# Altium PCB Arduino幻彩灯带.PcbDoc
Units mm, origin at the board's own origin, x right, y up, seen from the top; angles counter-clockwise.
Board outline 62.87 x 53.73 mm, 2 copper layers (Top Layer, Bottom Layer); 30 components, 36 nets, 147 pads, 2 vias.
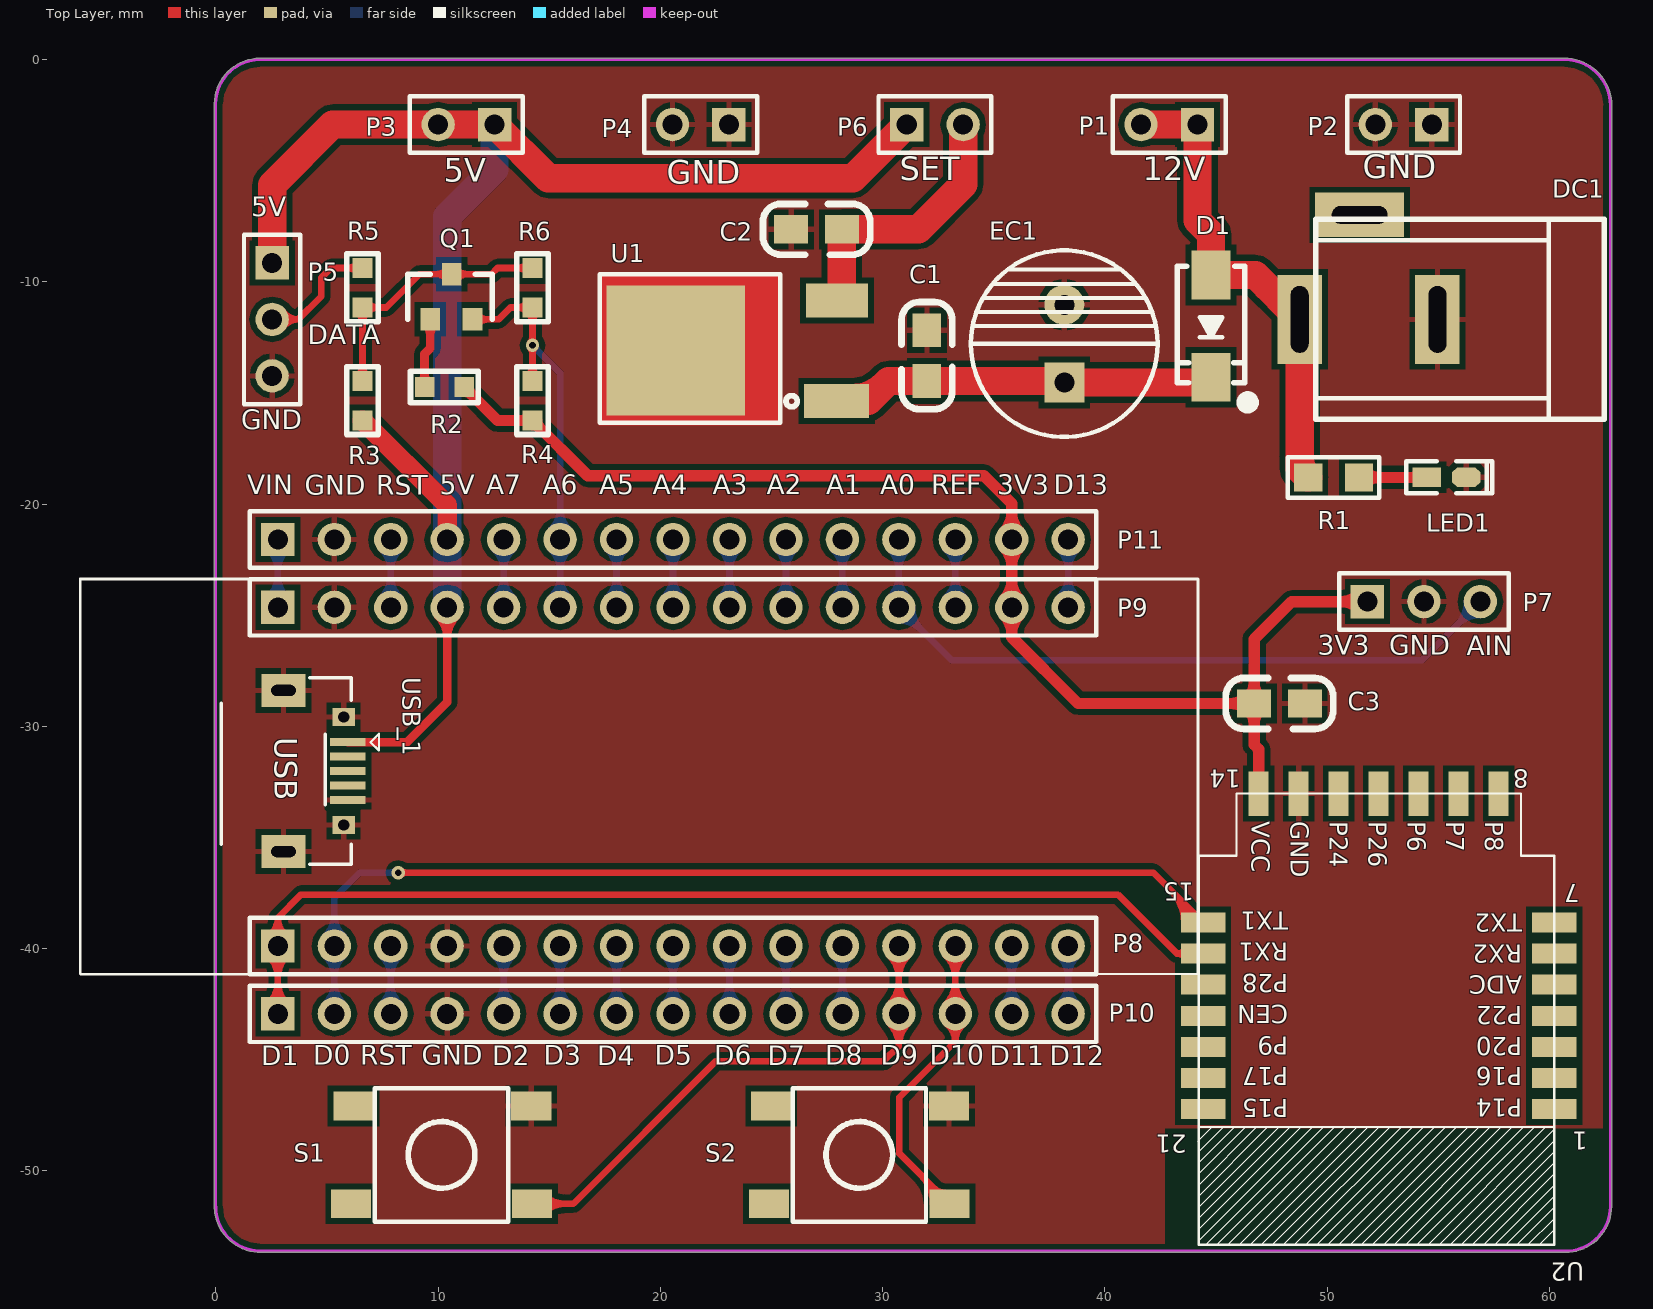
[diagram p0: Top Layer view]
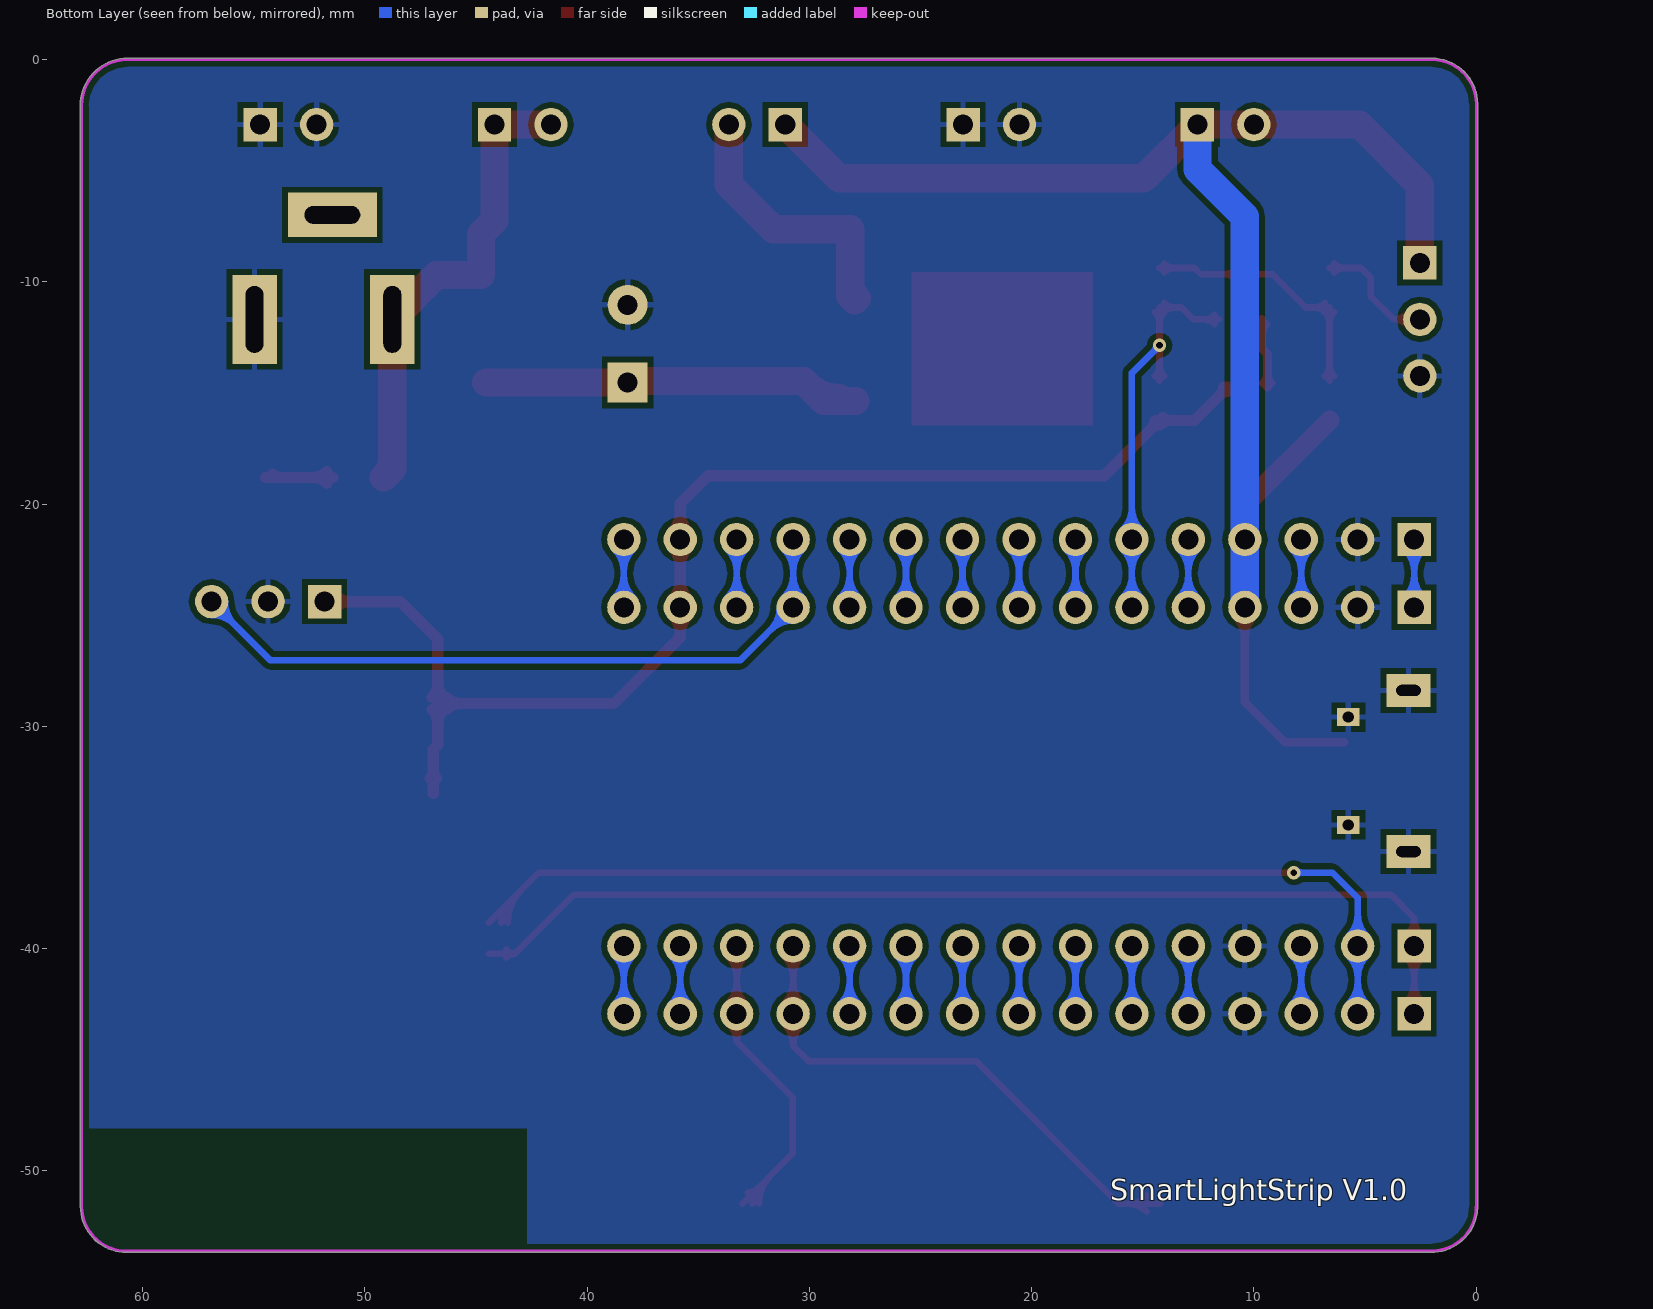
[diagram p1: Bottom Layer view, seen from below]
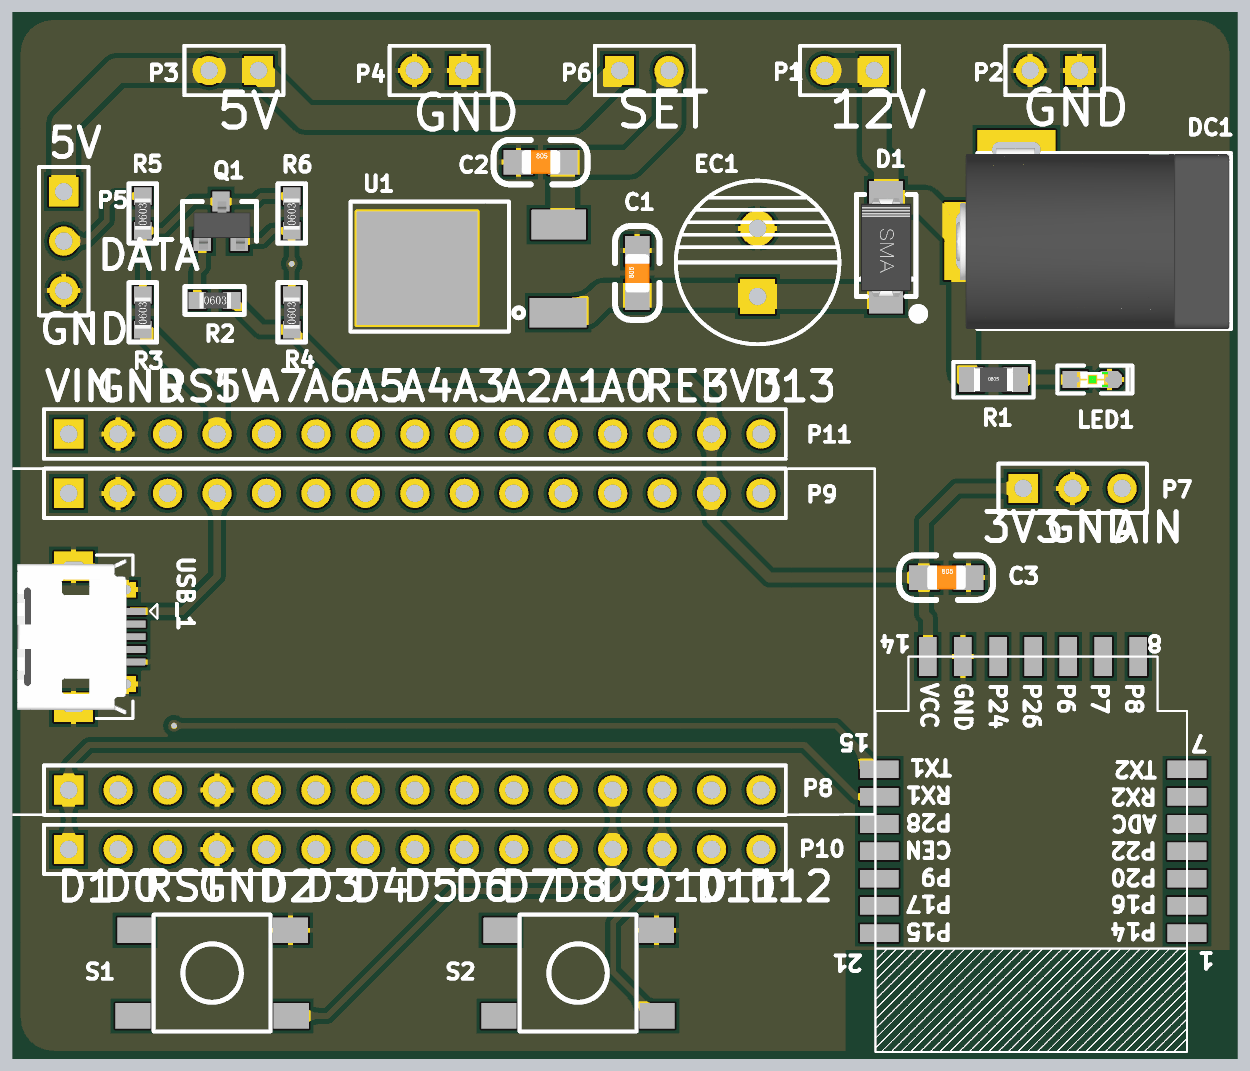
[diagram p2: 3D render of the assembled board from above, using the file's embedded part models]

## Layer stack, top to bottom
Top Layer: signal copper 0.0356
Dielectric: dielectric 0.32, FR-4, Dk 4.8
Bottom Layer: signal copper 0.0356

## Board outline
-0.053,-51.724 ccw(c2.007,-51.594) 1.884,-53.654 ccw(c1.905,-53.594) 1.905,-53.658 60.696,-53.658 ccw(c60.725,-53.601) 60.725,-53.665 ccw(c60.725,-51.587) 62.802,-51.587 62.802,-2.093 ccw(c62.745,-2.064) 62.809,-2.064 ccw(c60.681,-2.064) 60.681,0.064 1.981,0.064 ccw(c1.981,0) 1.977,0.064 ccw(c2,-2) -0.064,-1.977 ccw(c0,-1.981) -0.064,-1.981 -0.064,-51.689 ccw(c0,-51.689)

## Design rules (kind name [scope] priority, off if disabled: settings)
Clearance Clearance_1 [All] p1: gap=0.254
Clearance [InNet('GND') vs InNetClass('All Nets')] p2: gap=0.254
HoleSize [All] p1: absolutevalues=TRUE maxlimit=3 minlimit=0.025 maxpercent=80.000 minpercent=20.000
HoleToHoleClearance [All] p1: gap=0 allowstackedmicrovias=TRUE
MinimumSolderMaskSliver [All] p1: minsoldermaskwidth=0
PolygonConnect PolygonConnect_5 [InNet('+3.3V') vs IsPad] p1: connectstyle=Direct reliefconductorwidth=0.254 reliefentries=4 polygonreliefangle="90 Angle"
PolygonConnect PolygonConnect_4 [InNet('+3.3V') vs IsVia] p2: connectstyle=Direct reliefconductorwidth=0.254 reliefentries=4 polygonreliefangle="90 Angle"
PolygonConnect PolygonConnect_3 [InNet('+5V') vs IsVia] p3: connectstyle=Direct reliefconductorwidth=0.254 reliefentries=4 polygonreliefangle="90 Angle"
PolygonConnect PolygonConnect_2 [InNet('+5V') vs IsPad] p4: connectstyle=Direct reliefconductorwidth=0.254 reliefentries=4 polygonreliefangle="90 Angle"
PolygonConnect PolygonConnect_1 [InNet('GND') vs IsVia] p5: connectstyle=Direct reliefconductorwidth=0.254 reliefentries=4 polygonreliefangle="90 Angle"
PolygonConnect [All] p6: connectstyle=Relief reliefconductorwidth=0.254 reliefentries=4 polygonreliefangle="90 Angle"
RoutingVias [All] p1: holewidth=0.2 width=1.27 viastyle="Through Hole" minholewidth=0.2 minwidth=0.2 maxholewidth=1.2 maxwidth=1.27
SilkToSilkClearance [All] p1: silktosilkclearance=0
SilkscreenOverComponentPads [All] p1: minsilkscreentomaskgap=0
SolderMaskExpansion [All] p1: expansion=0.102
TestPointUsage FabricationTestPointUsage [All] p1: valid=0 allowmultiple=FALSE
Testpoint FabricationTestpoint [All] p1: side=3 testpointundercomponent=TRUE minsize=1.016 maxsize=2.54 preferedsize=1.524 minholesize=0 maxholesize=1.016 preferedholesize=0.813 testpointgrid=0.025 style=297 order=0123456789
Width [All] p1: maxlimit=6 minlimit=0.254 preferedwidth=0.254
19 further rules are at their usual default settings.

## Components (designator, comment, footprint, x,y, rotation, side; value= is the part's Value field where it differs from the comment)
C1 "104" 0805C 32.004,-12.192 r270 top
C2 "104" 0805C 25.908,-7.62 r0 top
C3 "104" 0805C 46.736,-28.956 r0 top
D1 "1N4007" SMA 44.78,-11.989 r270 top
DC1 "DC_Socket" DC-005 48.768,-11.684 r0 top
EC1 "100uf/50V" DIP-EC3.5X8X11.5 38.176,-14.529 r90 top
LED1 "红色" "LED 0603R" 55.372,-18.796 r0 top
P1 "Header 2" HDR1X2 44.171,-2.921 r180 top
P2 "Header 2" HDR1X2 54.712,-2.921 r180 top
P3 "Header 2" HDR1X2 12.548,-2.921 r180 top
P4 "Header 2" HDR1X2 23.089,-2.921 r180 top
P5 "Header 3" HDR1X3 2.54,-9.144 r270 top
P6 "Header 2" HDR1X2 31.09,-2.921 r0 top
P7 "Header 3" HDR1X3 51.816,-24.384 r0 top
P8 "Header 15" HDR1X15 2.794,-39.878 r0 top
P9 "Header 15" HDR1X15 2.794,-24.638 r0 top
P10 "Header 15" HDR1X15 2.794,-42.926 r0 top
P11 "Header 15" HDR1X15 2.794,-21.59 r0 top
Q1 "S8050" SOT-23-NPN 9.652,-11.684 r0 top
R1 "10K±5%" R0805 50.292,-18.796 r0 top
R2 "2K±5%" R0603 11.176,-14.732 r180 top
R3 "2K±5%" R0603 6.604,-16.231 r90 top
R4 "2K±5%" R0603 14.249,-16.231 r90 top
R5 "1R±5%" R0603 6.604,-11.151 r90 top
R6 "NC/0R" R0603 14.249,-11.151 r90 top
S1 "KEY_SW2" KEY4-SMD 10.16,-49.276 r180 top
S2 "KEY_SW2" KEY4-SMD 28.956,-49.276 r180 top
U1 "LM7805" TO252 27.94,-15.24 r90 top
U2 "WIFI_BLE_CBU" WIFI_BLE_CBU 52.324,-33.02 r180 top
USB_1 "MicroUSB" USB-micro_A 3.048,-32.004 r270 top

## Footprints (in the part's own frame and the unit in brackets; to place one, negate y for a bottom-side part, rotate by r counter-clockwise, add the part's x,y. Pads: shape width x height; smd on the part's side, far side on the other; paste and mask are expansions set on the pad)
0805C [mil]
  rect 60x50 smd: 1(-0.71,-0.4) 2(89.29,-0.4)
  silkscreen extent -51,-45 139,45, body extent 6,-25 84,25, height 31
DC-005 [mm] "5.5X2.1mm"
  rect 2x4 hole 0.8 slot 3 at 90 deg: 1(0,0) 2(6.2,0)
  rect 4x2 hole 0.8 slot 2.5 at 0 deg: 3(2.7,4.7)
  silkscreen extent 0.72,-4.5 13.7,4.5, body extent -0.4,-4.52 13.65,4.78, height 11.2
DIP-EC3.5X8X11.5 [mm]
  rect 1.8x1.8 hole 0.9: 1(0,0)
  round 1.8 hole 0.9: 2(3.5,0)
  silkscreen extent -2.45,-4.2 5.95,4.2, body extent -2.25,-4 5.75,4, height 11.53
HDR1X2 [mm] "Connector; Header; 2 Position"
  rect 1.5x1.5 hole 0.9: 1(0,0)
  round 1.5 hole 0.9: 2(2.54,0)
  silkscreen extent -1.27,-1.27 3.81,1.27
HDR1X3 [mm] "Connector; Header; 3 Position"
  rect 1.5x1.5 hole 0.9: 1(0,0)
  round 1.5 hole 0.9: 2(2.54,0) 3(5.08,0)
  silkscreen extent -1.27,-1.27 6.35,1.27
HDR1X15 [mm] "Connector; Header; 15 Position"
  rect 1.5x1.5 hole 0.9: 1(0,0)
  round 1.5 hole 0.9: 2(2.54,0) 3(5.08,0) 4(7.62,0) 5(10.16,0) 6(12.7,0) 7(15.24,0) 8(17.78,0) 9(20.32,0) 10(22.86,0) 11(25.4,0) 12(27.94,0) 13(30.48,0) 14(33.02,0) 15(35.56,0)
  silkscreen extent -1.27,-1.27 36.83,1.27
KEY4-SMD [mm]
  rect 1.8x1.3 smd: 1(-4.035,-2.2) 2(-4.065,2.2) 3(4.065,2.2) 4(3.965,-2.2)
  silkscreen extent -3,-3 3,3
"LED 0603R" [mil]
  rect 50x35 smd: 1(-35,0.26)
  oct 50x35 smd: 2(35,0.26)
  silkscreen extent -71,-28 81,28, body extent -31,-16 31,16, height 24
R0603 [mil]
  rect 35x35 smd: 1(0,0) 2(70,0)
  silkscreen extent -25,-28 95,28, body extent 2,-16 65,16, height 18
R0805 [mil]
  rect 50x50 smd: 1(-45,0) 2(45,0)
  silkscreen extent -81,-36 81,36, body extent -39,-25 39,25, height 20
SMA [mm]
  rect 2.2x1.75 smd: 1(-2.3,0) 2(2.3,0)
  silkscreen extent -2.7,-1.52 3.68,1.91, body extent -2.53,-1.3 2.57,1.3, height 2.15
SOT-23-NPN [mil]
  rect 35x40 smd: 1(75,0) 2(0,0) 3(38,80)
  silkscreen extent -40,0 110,80, body extent -17,-17 97,80, height 39
TO252 [mil] "252晶体管"
  rect 60x115 smd: 1(-4.55,0.23)
  rect 230x245 smd: 2(85,285.35)
  rect 60x110 smd: 3(173.45,-0.77)
  silkscreen extent -43,70 220,420, body extent -41,5 215,375, height 91
USB-micro_A [mm] "micro型USB ，5.7*7.8*2.5mm"
  rect 0.35x1.6 smd: 1(-1.3,2.9) 2(-0.65,2.9) 3(0,2.9) 4(0.65,2.9) 5(1.3,2.9)
  rect 1.5x2 hole 0.5 slot 1.1 at 90 deg: 5(-3.625,0) 5(3.625,0)
  rect 0.8x1 hole 0.5: 5(-2.425,2.71) 5(2.425,2.71)
  silkscreen extent -4.19,-2.79 4.19,4.3, body extent -4,-2.71 4,2.89, height 2.8
WIFI_BLE_CBU [mm]
  rect 2x0.9 smd: 1(-7.9,14.2) 2(-7.9,12.8) 3(-7.9,11.4) 4(-7.9,10) 5(-7.9,8.6) 6(-7.9,7.2) 7(-7.9,5.8) 15(7.9,5.8) 16(7.9,7.2) 17(7.9,8.6) 18(7.9,10) 19(7.9,11.4) 20(7.9,12.8) 21(7.9,14.2)
  rect 0.9x2 smd: 8(-5.4,0) 9(-3.6,0) 10(-1.8,0) 11(0,0) 12(1.8,0) 13(3.6,0) 14(5.4,0)
  silkscreen extent -7.9,0 8.14,20.33

## Part data
C1 C2 C3: library part CAP, "无极性电容"
D1: "整流二极管"
EC1: library part DIP_ECAP, "直插电解电容"
LED1: library part LED-SMD, "贴片LED"
P1 P2 P3 P4 P6: "Header, 2-Pin"
P5 P7: "Header, 3-Pin"
P8 P9 P10 P11: "Header, 15-Pin"
Q1: library part NPN, "NPN Transistor"
R1 R2 R3 R4 R5 R6: library part RES5
U2: "Module"

## Via types
v1: diameter 0.6, hole 0.3, Top Layer to Bottom Layer, 2 vias

## Nets (pads, with @x,y where several pads share a name; then routed paths per layer and width w, separated by ;. In a path a pad name is that pad's centre, name@x,y a point inside that pad or via, vN(x,y) a via of type N, cw(c..) or ccw(c..) an arc to the next point about the centre after c; other vN are vias at no path point)
3V3: C3.1 P7.1 P9.14 P11.14 R2.1 R4.1 U2.14 | length 74.4
  Top Layer w0.508: R2.1@11.176,-14.922 cw(c11.176,-15.382) 11.501,-15.057 cw(c11.826,-14.732) R2.1@11.367,-14.732 ; R2.1 12.675,-16.231 R4.1 16.739,-18.72 34.569,-18.72 35.814,-19.964 P11.14 P9.14 35.814,-25.984 38.796,-28.966 C3.1 ; R4.1@14.115,-16.365 ccw(c13.789,-16.691) 13.789,-16.231 ccw(c13.789,-15.771) R4.1@14.115,-16.096 ; R4.1@14.249,-16.421 cw(c14.249,-16.881) 14.575,-16.556 cw(c14.9,-16.231) R4.1@14.44,-16.231 ; P9.14@35.463,-24.989 cw(c34.617,-25.835) 35.814,-25.835 cw(c37.011,-25.835) P9.14@36.165,-24.989 ; P9.14@35.463,-24.287 ccw(c34.617,-23.441) 35.814,-23.441 ccw(c37.011,-23.441) P9.14@36.165,-24.287 ; P11.14@35.463,-21.941 cw(c34.617,-22.787) 35.814,-22.787 cw(c37.011,-22.787) P11.14@36.165,-21.941 ; P11.14@35.463,-21.239 ccw(c34.617,-20.393) 35.814,-20.393 ccw(c37.011,-20.393) P11.14@36.165,-21.239 ; C3.1@46.322,-29.236 ccw(c45.671,-29.886) 45.671,-28.966 ccw(c45.671,-28.046) C3.1@46.322,-28.697 ; C3.1@46.449,-29.236 cw(c45.798,-29.886) 46.718,-29.886 cw(c47.638,-29.886) C3.1@46.987,-29.236 ; C3.1@46.449,-28.697 ccw(c45.798,-28.046) 46.718,-28.046 ccw(c47.638,-28.046) C3.1@46.987,-28.697 ; U2.14@46.785,-32.331 ccw(c46.451,-31.997) 46.924,-31.997 ccw(c47.397,-31.997) U2.14@47.063,-32.331 ; U2.14 46.924,-31.024 46.718,-30.818 C3.1 ; P7.1@51.465,-24.735 ccw(c50.619,-25.581) 50.619,-24.384 ccw(c50.619,-23.187) P7.1@51.465,-24.033 ; P7.1 48.412,-24.384 46.718,-26.078 C3.1
5V: P3.1 P3.2 P5.1 P6.1 P9.4 P11.4 R3.1 USB_1.1 | length 76.3
  Top Layer w0.381: USB_1.1 8.615,-30.704 10.414,-28.905 P9.4 ; P9.4@10.018,-25.034 cw(c9.063,-25.989) 10.414,-25.989 cw(c11.765,-25.989) P9.4@10.81,-25.034
  Top Layer w0.889: R3.1 10.414,-20.041 P11.4
  Top Layer w1.27: P5.1 2.54,-5.639 5.258,-2.921 P3.2 P3.1 14.961,-5.334 28.677,-5.334 P6.1
  Bottom Layer w1.27: P9.4 P11.4 10.414,-7.061 12.548,-4.928 P3.1
12V: D1.1 DC1.1 P1.1 P1.2 R1.1 | length 24.1
  Top Layer w1.27: P1.2 P1.1 44.171,-7.239 44.78,-7.849 D1.1 46.773,-9.689 DC1.1 48.768,-18.415 R1.1 cw(c50.069,-17.876) 48.768,-17.876 ; 47.273,-10.189 ccw(c48.047,-9.415) DC1.1@48.588,-10.367
A0: P7.3 P9.12 P11.12 | length 40.4
  Bottom Layer w0.3: P9.12@30.31,-24.214 ccw(c29.285,-23.189) 30.734,-23.189 ccw(c32.183,-23.189) P9.12@31.158,-24.214 ; P11.12@30.31,-22.014 cw(c29.285,-23.039) 30.734,-23.039 cw(c32.183,-23.039) P11.12@31.158,-22.014 ; P9.12@30.734,-25.238 cw(c30.734,-26.687) 31.758,-25.662 cw(c32.783,-24.638) P9.12@31.334,-24.638 ; P11.12 P9.12 33.122,-27.026 54.254,-27.026 P7.3 ; P7.3@56.296,-24.384 cw(c54.847,-24.384) 55.872,-25.408 cw(c56.896,-26.433) P7.3@56.896,-24.984
A1: P9.11 P11.11 | length 7.6
  Bottom Layer w0.3: P9.11@27.77,-24.214 ccw(c26.745,-23.189) 28.194,-23.189 ccw(c29.643,-23.189) P9.11@28.618,-24.214 ; P11.11@27.77,-22.014 cw(c26.745,-23.039) 28.194,-23.039 cw(c29.643,-23.039) P11.11@28.618,-22.014 ; P9.11 P11.11
A2: P9.10 P11.10 | length 7.6
  Bottom Layer w0.3: P9.10@25.23,-24.214 ccw(c24.205,-23.189) 25.654,-23.189 ccw(c27.103,-23.189) P9.10@26.078,-24.214 ; P11.10@25.23,-22.014 cw(c24.205,-23.039) 25.654,-23.039 cw(c27.103,-23.039) P11.10@26.078,-22.014 ; P9.10 P11.10
A3: P9.9 P11.9 | length 7.6
  Bottom Layer w0.3: P9.9@22.69,-24.214 ccw(c21.665,-23.189) 23.114,-23.189 ccw(c24.563,-23.189) P9.9@23.538,-24.214 ; P11.9@22.69,-22.014 cw(c21.665,-23.039) 23.114,-23.039 cw(c24.563,-23.039) P11.9@23.538,-22.014 ; P9.9 P11.9
A4: P9.8 P11.8 | length 7.6
  Bottom Layer w0.3: P9.8@20.15,-24.214 ccw(c19.125,-23.189) 20.574,-23.189 ccw(c22.023,-23.189) P9.8@20.998,-24.214 ; P11.8@20.15,-22.014 cw(c19.125,-23.039) 20.574,-23.039 cw(c22.023,-23.039) P11.8@20.998,-22.014 ; P9.8 P11.8
A5: P9.7 P11.7 | length 7.6
  Bottom Layer w0.3: P9.7@17.61,-24.214 ccw(c16.585,-23.189) 18.034,-23.189 ccw(c19.483,-23.189) P9.7@18.458,-24.214 ; P11.7@17.61,-22.014 cw(c16.585,-23.039) 18.034,-23.039 cw(c19.483,-23.039) P11.7@18.458,-22.014 ; P9.7 P11.7
A6: P9.6 P11.6 Q1.1 R4.2 R6.1 | length 31.5
  Top Layer w0.3: Q1.1 12.725,-11.684 13.259,-11.151 R6.1 v1(14.249,-12.852) R4.2 ; Q1.1@11.765,-11.892 cw(c12.268,-12.395) 12.268,-11.684 cw(c12.268,-10.973) Q1.1@11.765,-11.476 ; R4.2@14.041,-14.244 ccw(c13.538,-13.742) 14.249,-13.742 ccw(c14.96,-13.742) R4.2@14.458,-14.244 ; R6.1@14.041,-10.942 cw(c13.538,-10.44) 13.538,-11.151 cw(c13.538,-11.862) 14.041,-11.359 cw(c13.538,-11.862) 14.249,-11.862 cw(c14.96,-11.862) R6.1@14.458,-11.359 ; v1@14.143,-12.958 cw(c13.887,-13.215) 14.249,-13.215 cw(c14.612,-13.215) v1@14.355,-12.958 ; v1@14.143,-12.746 ccw(c13.887,-12.49) 14.249,-12.49 ccw(c14.612,-12.49) v1@14.355,-12.746
  Bottom Layer w0.3: v1@14.249,-13.002 cw(c14.249,-13.365) 14.505,-13.108 cw(c14.762,-12.852) v1@14.399,-12.852 ; v1(14.249,-12.852) 15.494,-14.097 P11.6 P9.6 ; P9.6@15.07,-24.214 ccw(c14.045,-23.189) 15.494,-23.189 ccw(c16.943,-23.189) P9.6@15.918,-24.214 ; P11.6@15.07,-22.014 cw(c14.045,-23.039) 15.494,-23.039 cw(c16.943,-23.039) P11.6@15.918,-22.014 ; P11.6@15.07,-21.166 ccw(c14.045,-20.141) 15.494,-20.141 ccw(c16.943,-20.141) P11.6@15.918,-21.166
A7: P9.5 P11.5 | length 7.6
  Bottom Layer w0.3: P9.5@12.53,-24.214 ccw(c11.505,-23.189) 12.954,-23.189 ccw(c14.403,-23.189) P9.5@13.378,-24.214 ; P11.5@12.53,-22.014 cw(c11.505,-23.039) 12.954,-23.039 cw(c14.403,-23.039) P11.5@13.378,-22.014 ; P9.5 P11.5
AREF: P9.13 P11.13 | length 7.6
  Bottom Layer w0.3: P9.13@32.85,-24.214 ccw(c31.825,-23.189) 33.274,-23.189 ccw(c34.723,-23.189) P9.13@33.698,-24.214 ; P11.13@32.85,-22.014 cw(c31.825,-23.039) 33.274,-23.039 cw(c34.723,-23.039) P11.13@33.698,-22.014 ; P9.13 P11.13
D0: P8.2 P10.2 U2.15 | length 56.3
  Top Layer w0.3: v1(8.204,-36.576) 42.18,-36.576 U2.15 ; v1@8.31,-36.682 cw(c8.566,-36.938) 8.566,-36.576 cw(c8.566,-36.214) v1@8.31,-36.47 ; 42.973,-37.369 cw(c41.522,-38.82) U2.15@43.574,-38.82 ; 43.485,-37.881 cw(c42.546,-38.82) U2.15@43.874,-38.82
  Bottom Layer w0.3: P10.2@4.91,-42.502 ccw(c3.885,-41.477) 5.334,-41.477 ccw(c6.783,-41.477) P10.2@5.758,-42.502 ; P8.2@4.91,-40.302 cw(c3.885,-41.327) 5.334,-41.327 cw(c6.783,-41.327) P8.2@5.758,-40.302 ; P8.2@4.91,-39.454 ccw(c3.885,-38.429) 5.334,-38.429 ccw(c6.783,-38.429) P8.2@5.758,-39.454 ; P10.2 P8.2 5.334,-37.719 6.477,-36.576 v1(8.204,-36.576) ; v1@8.098,-36.682 ccw(c7.842,-36.938) 7.842,-36.576 ccw(c7.842,-36.214) v1@8.098,-36.47
D1: P8.1 P10.1 U2.16 | length 54.8
  Top Layer w0.3: P10.1@2.37,-42.502 ccw(c1.345,-41.477) 2.794,-41.477 ccw(c4.243,-41.477) P10.1@3.218,-42.502 ; P8.1@2.37,-40.302 cw(c1.345,-41.327) 2.794,-41.327 cw(c4.243,-41.327) P8.1@3.218,-40.302 ; P8.1@2.413,-39.415 ccw(c1.75,-38.608) 2.794,-38.608 ; P10.1 P8.1 2.794,-38.608 ; P8.1@3.175,-39.415 cw(c3.838,-38.608) 2.794,-38.608 ; U2.16@43.641,-40.409 ccw(c43.243,-40.734) 43.243,-40.22 ; U2.16@43.641,-40.031 cw(c43.243,-39.706) 43.243,-40.22 ; U2.16 43.243,-40.22 ; 2.794,-38.608 3.835,-37.567 40.589,-37.567 43.243,-40.22
D2: P8.5 P10.5 | length 7.6
  Bottom Layer w0.3: P10.5@12.53,-42.502 ccw(c11.505,-41.477) 12.954,-41.477 ccw(c14.403,-41.477) P10.5@13.378,-42.502 ; P8.5@12.53,-40.302 cw(c11.505,-41.327) 12.954,-41.327 cw(c14.403,-41.327) P8.5@13.378,-40.302 ; P10.5 P8.5
D3: P8.6 P10.6 | length 7.6
  Bottom Layer w0.3: P10.6@15.07,-42.502 ccw(c14.045,-41.477) 15.494,-41.477 ccw(c16.943,-41.477) P10.6@15.918,-42.502 ; P8.6@15.07,-40.302 cw(c14.045,-41.327) 15.494,-41.327 cw(c16.943,-41.327) P8.6@15.918,-40.302 ; P10.6 P8.6
D4: P8.7 P10.7 | length 7.6
  Bottom Layer w0.3: P10.7@17.61,-42.502 ccw(c16.585,-41.477) 18.034,-41.477 ccw(c19.483,-41.477) P10.7@18.458,-42.502 ; P8.7@17.61,-40.302 cw(c16.585,-41.327) 18.034,-41.327 cw(c19.483,-41.327) P8.7@18.458,-40.302 ; P10.7 P8.7
D5: P8.8 P10.8 | length 7.6
  Bottom Layer w0.3: P10.8@20.15,-42.502 ccw(c19.125,-41.477) 20.574,-41.477 ccw(c22.023,-41.477) P10.8@20.998,-42.502 ; P8.8@20.15,-40.302 cw(c19.125,-41.327) 20.574,-41.327 cw(c22.023,-41.327) P8.8@20.998,-40.302 ; P10.8 P8.8
D6: P8.9 P10.9 | length 7.6
  Bottom Layer w0.3: P10.9@22.69,-42.502 ccw(c21.665,-41.477) 23.114,-41.477 ccw(c24.563,-41.477) P10.9@23.538,-42.502 ; P8.9@22.69,-40.302 cw(c21.665,-41.327) 23.114,-41.327 cw(c24.563,-41.327) P8.9@23.538,-40.302 ; P10.9 P8.9
D7: P8.10 P10.10 | length 7.6
  Bottom Layer w0.3: P10.10@25.23,-42.502 ccw(c24.205,-41.477) 25.654,-41.477 ccw(c27.103,-41.477) P10.10@26.078,-42.502 ; P8.10@25.23,-40.302 cw(c24.205,-41.327) 25.654,-41.327 cw(c27.103,-41.327) P8.10@26.078,-40.302 ; P10.10 P8.10
D8: P8.11 P10.11 | length 7.6
  Bottom Layer w0.3: P10.11@27.77,-42.502 ccw(c26.745,-41.477) 28.194,-41.477 ccw(c29.643,-41.477) P10.11@28.618,-42.502 ; P8.11@27.77,-40.302 cw(c26.745,-41.327) 28.194,-41.327 cw(c29.643,-41.327) P8.11@28.618,-40.302 ; P10.11 P8.11
D9: P8.12 P10.12 S1.2 | length 32.7
  Top Layer w0.3: S1.2 16.088,-51.476 22.504,-45.06 30.048,-45.06 30.734,-44.374 ; S1.2@14.829,-51.83 cw(c15.682,-52.683) 15.682,-51.476 cw(c15.682,-50.269) S1.2@14.829,-51.122 ; P10.12@30.31,-43.35 cw(c29.287,-44.374) 30.734,-44.374 ; P10.12@30.31,-42.502 ccw(c29.285,-41.477) 30.734,-41.477 ccw(c32.183,-41.477) P10.12@31.158,-42.502 ; P8.12@30.31,-40.302 cw(c29.285,-41.327) 30.734,-41.327 cw(c32.183,-41.327) P8.12@31.158,-40.302 ; P8.12 P10.12 30.734,-44.374 ; P10.12@31.158,-43.35 ccw(c32.181,-44.374) 30.734,-44.374
D10: P8.13 P10.13 S2.2 | length 22.7
  Top Layer w0.3: 31.741,-50.196 cw(c30.46,-51.476) S2.2@32.271,-51.476 ; 32.253,-50.708 cw(c31.485,-51.476) S2.2@32.571,-51.476 ; 32.344,-50.799 ccw(c32.771,-50.372) S2.2@32.771,-50.976 ; P10.13@32.85,-42.502 ccw(c31.825,-41.477) 33.274,-41.477 ccw(c34.723,-41.477) P10.13@33.698,-42.502 ; P8.13@32.85,-40.302 cw(c31.825,-41.327) 33.274,-41.327 cw(c34.723,-41.327) P8.13@33.698,-40.302 ; P10.13@32.9,-43.395 cw(c32.283,-44.171) 33.274,-44.171 ; S2.2 30.759,-49.214 30.759,-46.685 33.274,-44.171 ; P8.13 P10.13 33.274,-44.171 ; P10.13@33.648,-43.395 ccw(c34.265,-44.171) 33.274,-44.171
D11: P8.14 P10.14 | length 7.6
  Bottom Layer w0.3: P10.14@35.39,-42.502 ccw(c34.365,-41.477) 35.814,-41.477 ccw(c37.263,-41.477) P10.14@36.238,-42.502 ; P8.14@35.39,-40.302 cw(c34.365,-41.327) 35.814,-41.327 cw(c37.263,-41.327) P8.14@36.238,-40.302 ; P10.14 P8.14
D12: P8.15 P10.15 | length 7.6
  Bottom Layer w0.3: P10.15@37.93,-42.502 ccw(c36.905,-41.477) 38.354,-41.477 ccw(c39.803,-41.477) P10.15@38.778,-42.502 ; P8.15@37.93,-40.302 cw(c36.905,-41.327) 38.354,-41.327 cw(c39.803,-41.327) P8.15@38.778,-40.302 ; P10.15 P8.15
D13: P9.15 P11.15 | length 7.6
  Bottom Layer w0.3: P9.15@37.93,-24.214 ccw(c36.905,-23.189) 38.354,-23.189 ccw(c39.803,-23.189) P9.15@38.778,-24.214 ; P11.15@37.93,-22.014 cw(c36.905,-23.039) 38.354,-23.039 cw(c39.803,-23.039) P11.15@38.778,-22.014 ; P9.15 P11.15
GND: C1.1 C2.1 C3.2 DC1.2 EC1.2 LED1.2 P2.1 P2.2 P4.1 P4.2 P5.3 P7.2 P8.4 P9.2 P10.4 P11.2 S1.1 S2.1 U1.2 U2.13 USB_1.5
NetC1_2: C1.2 D1.2 EC1.1 U1.1 | length 18.6
  Top Layer w1.27: U1.1 29.374,-15.356 30.269,-14.46 C1.2 EC1.1@38.107,-14.46 ; U1.1@28.633,-15.229 ccw(c28.633,-13.133) 30.115,-14.615 ; EC1.1 D1.2@44.54,-14.529
NetLED1_1: LED1.1 R1.2 | length 4.9
  Top Layer w0.508: R1.2 LED1.1@54.477,-18.796 ; R1.2@51.704,-19.065 cw(c52.355,-19.716) 52.355,-18.796 cw(c52.355,-17.876) R1.2@51.704,-18.527 ; 53.817,-18.796 ccw(c53.817,-18.314) LED1.1@54.158,-18.655
NetP5_2: P5.2 R5.2 | length 8.2
  Top Layer w0.3: P5.2 3.708,-11.684 ; P5.2@3.028,-12.034 cw(c3.708,-12.522) 3.708,-11.684 ; P5.2@3.028,-11.334 ccw(c3.708,-10.846) 3.708,-11.684 ; R5.2@6.396,-9.581 ccw(c5.893,-10.084) 5.893,-9.373 ccw(c5.893,-8.662) R5.2@6.396,-9.164 ; R5.2 5.182,-9.373 4.75,-9.804 4.75,-10.643 3.708,-11.684
NetQ1_2: Q1.2 R2.2 | length 5
  Top Layer w0.4: R2.2@9.225,-14.559 ccw(c8.808,-14.142) 9.398,-14.142 ccw(c9.988,-14.142) R2.2@9.571,-14.559 ; R2.2 9.398,-13.233 9.652,-12.979 Q1.2 ; Q1.2@9.479,-11.92 cw(c9.062,-12.338) 9.652,-12.338 cw(c10.242,-12.338) Q1.2@9.825,-11.92
NRST0: P8.3 P10.3 | length 7.6
  Bottom Layer w0.3: P10.3@7.45,-42.502 ccw(c6.425,-41.477) 7.874,-41.477 ccw(c9.323,-41.477) P10.3@8.298,-42.502 ; P8.3@7.45,-40.302 cw(c6.425,-41.327) 7.874,-41.327 cw(c9.323,-41.327) P8.3@8.298,-40.302 ; P10.3 P8.3
NRST1: P9.3 P11.3 | length 7.6
  Bottom Layer w0.3: P9.3@7.45,-24.214 ccw(c6.425,-23.189) 7.874,-23.189 ccw(c9.323,-23.189) P9.3@8.298,-24.214 ; P11.3@7.45,-22.014 cw(c6.425,-23.039) 7.874,-23.039 cw(c9.323,-23.039) P11.3@8.298,-22.014 ; P9.3 P11.3
OUT_RGB: Q1.3 R3.2 R5.1 R6.2 | length 18.4
  Top Layer w0.3: R3.2@6.396,-14.244 ccw(c5.893,-13.742) 6.604,-13.742 ccw(c7.315,-13.742) R3.2@6.812,-14.244 ; R5.1@6.396,-11.359 cw(c5.893,-11.862) 6.604,-11.862 cw(c7.315,-11.862) 6.812,-11.359 cw(c7.315,-11.862) 7.315,-11.151 cw(c7.315,-10.44) R5.1@6.812,-10.942 ; R3.2 R5.1 7.671,-11.151 9.169,-9.652 Q1.3 12.395,-9.652 12.675,-9.373 R6.2 ; Q1.3@10.409,-9.86 ccw(c9.906,-10.363) 9.906,-9.652 ccw(c9.906,-8.941) Q1.3@10.409,-9.444 ; Q1.3@10.825,-9.86 cw(c11.328,-10.363) 11.328,-9.652 cw(c11.328,-8.941) Q1.3@10.825,-9.444 ; R6.2@14.041,-9.581 ccw(c13.538,-10.084) 13.538,-9.373 ccw(c13.538,-8.662) R6.2@14.041,-9.164
POWER_5V: C2.2 P6.2 U1.3 | length 13.1
  Top Layer w1.27: U1.3@27.87,-10.745 ccw(c27.148,-10.023) 28.169,-10.023 ; U1.3 28.169,-10.625 28.169,-7.63 31.613,-7.63 33.63,-5.613 P6.2
VIN: P9.1 P11.1 | length 7.6
  Bottom Layer w0.3: P9.1@2.37,-24.214 ccw(c1.345,-23.189) 2.794,-23.189 ccw(c4.243,-23.189) P9.1@3.218,-24.214 ; P11.1@2.37,-22.014 cw(c1.345,-23.039) 2.794,-23.039 cw(c4.243,-23.039) P11.1@3.218,-22.014 ; P9.1 P11.1
pads on no net: DC1.3 S1.3 S1.4 S2.3 S2.4 U2.1 U2.2 U2.3 U2.4 U2.5 U2.6 U2.7 U2.8 U2.9 U2.10 U2.11 U2.12 U2.17 U2.18 U2.19 U2.20 U2.21 USB_1.2 USB_1.3 USB_1.4

## Polygon pours and split planes (outlines as drawn)
GND on Top Layer "BottomLayer-GND" (solid, remove dead copper, pour order 1000): 0,0 62.814,0 62.814,-53.543 62.738,-53.619 62.687,-53.67 -0.051,-53.67
GND on Bottom Layer "BottomLayer-GND" (solid, remove dead copper, pour order 1001): 0,0 62.814,0 62.738,-0.076 62.738,-53.594 -0.051,-53.594

## Keep-outs
Keep-Out Layer:
  lines w0.127: 0,-51.689 0,-1.981 ; 0,-2 cw(c2,-2) 2,0 ; 0.007,-51.594 ccw(c2.007,-51.594) 2.007,-53.594 ; 1.905,-53.594 60.725,-53.594 ; 1.981,0 60.681,0 cw(c60.681,-2.064) 62.745,-2.064 ; 60.725,-53.601 ccw(c60.725,-51.587) 62.738,-51.587 62.738,-2.064

## Other copper
Top Layer:
  rectangle net GND: 17.247,-16.459 25.4,-9.55
  pour cut-out: 42.697,-48.057 42.723,-48.082 62.738,-48.082 62.738,-53.619 62.713,-53.594 42.697,-53.594
Bottom Layer:
  pour cut-out: 42.697,-48.082 62.738,-48.082 62.738,-53.594 42.697,-53.594

## Silkscreen, mask and mechanical layers (free items; w line width, h text height)
Top Overlay:
  lines w0.127: 1.524,-41.148 -6.071,-41.148 -6.096,-41.123 -6.096,-23.368 1.524,-23.368 ; 39.624,-41.148 44.199,-41.123 44.196,-23.368 39.624,-23.368
  text "GND" at 51.613,-5.69 h1.8
  text "SET" at 30.785,-5.791 h1.8
  text "12V" at 41.707,-5.791 h1.8
  text "5V" at 10.262,-5.842 h1.8
  text "GND" at 20.295,-5.944 h1.8
  text "5V" at 1.6,-7.341 h1.5
  text "DATA" at 4.14,-13.106 h1.5
  text "GND" at 1.143,-16.916 h1.5
  text "VIN" at 1.422,-19.847 h1.5
  text "5V" at 10.084,-19.847 h1.5
  text "A7" at 12.167,-19.847 h1.5
  text "A6" at 14.707,-19.85 h1.5
  text "A5" at 17.247,-19.847 h1.5
  text "A4" at 19.66,-19.85 h1.5
  text "A3" at 22.352,-19.85 h1.5
  text "A2" at 24.79,-19.85 h1.5
  text "A1" at 27.457,-19.85 h1.5
  text "A0" at 29.896,-19.85 h1.5
  text "REF" at 32.182,-19.847 h1.5
  text "3V3" at 35.154,-19.85 h1.5
  text "D13" at 37.694,-19.85 h1.5
  text "GND" at 4.013,-19.863 h1.5
  text "RST" at 7.214,-19.863 h1.5
  text "3V3" at 49.581,-27.076 h1.5
  text "GND" at 52.807,-27.076 h1.5
  text "AIN" at 56.286,-27.094 h1.5
  text "D0" at 4.394,-45.517 h1.5
  text "RST" at 6.502,-45.517 h1.5
  text "GND" at 9.262,-45.517 h1.5
  text "D3" at 14.757,-45.517 h1.5
  text "D5" at 19.761,-45.517 h1.5
  text "D6" at 22.428,-45.517 h1.5
  text "D8" at 27.432,-45.517 h1.5
  text "D9" at 29.921,-45.517 h1.5
  text "D10" at 32.131,-45.517 h1.5
  text "D1" at 2.057,-45.542 h1.5
  text "D2" at 12.446,-45.534 h1.5
  text "D4" at 17.17,-45.534 h1.5
  text "D7" at 24.841,-45.534 h1.5
  text "D11" at 34.823,-45.534 h1.5
  text "D12" at 37.516,-45.534 h1.5
Bottom Overlay:
  text "SmartLightStrip V1.0" at 16.459,-51.638 h1.6

## Text inside footprints (layer, text, board x,y; h text height)
U2: Top Overlay "P15" at 48.258,-46.761 h0.8 r180; Top Overlay "P17" at 48.258,-45.343 h0.8 r180; Top Overlay "P9" at 48.258,-43.956 h0.8 r180; Top Overlay "CEN" at 48.258,-42.553 h0.8 r180; Top Overlay "P28" at 48.258,-41.15 h0.8 r180; Top Overlay "RX1" at 48.258,-39.731 h0.8 r180; Top Overlay "TX1" at 48.258,-38.329 h0.8 r180; Top Overlay "GND" at 48.362,-34.265 h0.8 r270; Top Overlay "VCC" at 46.609,-34.266 h0.8 r270; Top Overlay "TX2" at 58.776,-38.43 h0.8 r180; Top Overlay "RX2" at 58.776,-39.829 h0.8 r180; Top Overlay "ADC" at 58.776,-41.211 h0.8 r180; Top Overlay "P22" at 58.776,-42.593 h0.8 r180; Top Overlay "P20" at 58.776,-43.975 h0.8 r180; Top Overlay "P16" at 58.776,-45.342 h0.8 r180; Top Overlay "P14" at 58.776,-46.74 h0.8 r180; Top Overlay "21" at 43.688,-48.362 h0.8 r180; Top Overlay "1" at 61.724,-48.24 h0.8 r180; Top Overlay "P24" at 50.13,-34.265 h0.8 r270; Top Overlay "P26" at 51.883,-34.265 h0.8 r270; Top Overlay "P6" at 53.631,-34.265 h0.8 r270; Top Overlay "P7" at 55.372,-34.265 h0.8 r270; Top Overlay "P8" at 57.125,-34.265 h0.8 r270; Top Overlay "7" at 61.368,-37.089 h0.8 r180; Top Overlay "8" at 59.08,-31.953 h0.8 r180; Top Overlay "14" at 46.126,-31.953 h0.8 r180; Top Overlay "15" at 44.018,-37.033 h0.8 r180
USB_1: Top Overlay "USB" at 2.646,-30.48 h1.02 r270